# Altium PCB PCB_DTNEA-Z-AXIS-PRESS-MONITOR-TRANSMITTER_2021-11-17.pcbdoc
Units mm, origin at the board's own origin, x right, y up, seen from the top; angles counter-clockwise.
Board outline 118.62 x 68.71 mm, 2 copper layers (Top Layer, Bottom Layer); 30 components, 27 nets, 121 pads, 21 vias.
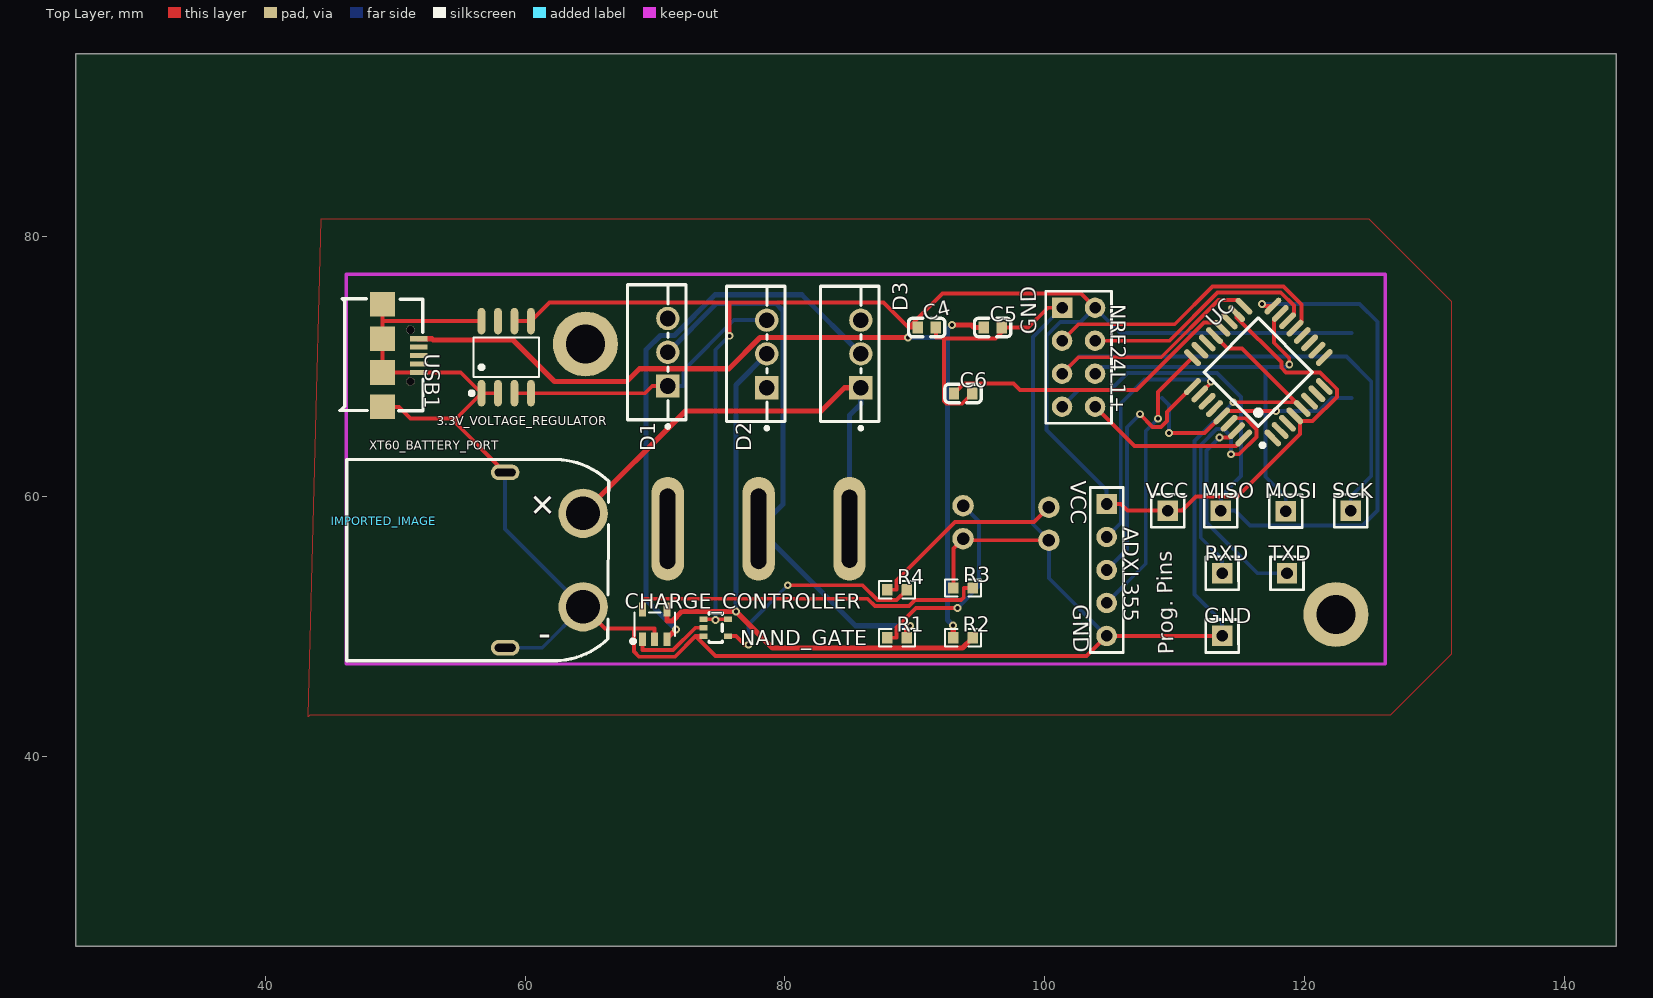
[diagram p0: Top Layer view]
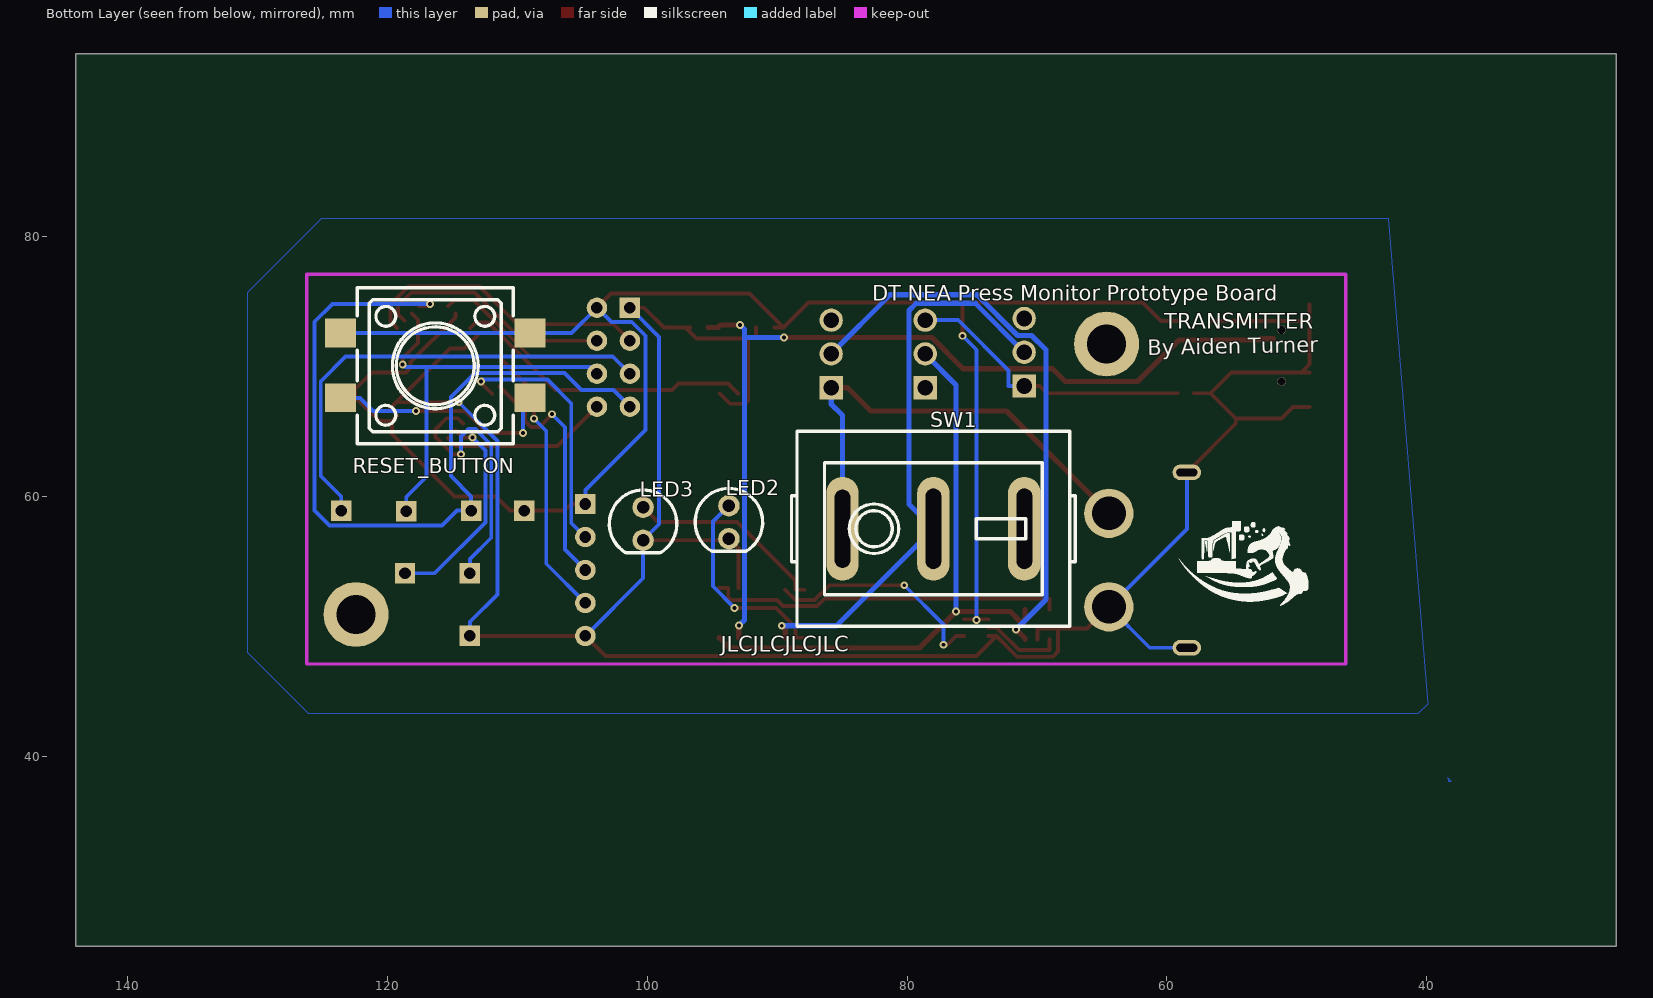
[diagram p1: Bottom Layer view, seen from below]

## Layer stack, top to bottom
Top Layer: signal copper (thickness not stored)
Dielectric: dielectric 0.32, FR-4, Dk 4.8
Bottom Layer: signal copper (thickness not stored)

## Board outline
144.018,25.4 25.4,25.4 25.4,94.107 144.018,94.107

## Components (designator, comment, footprint, x,y, rotation, side; value= is the part's Value field where it differs from the comment)
3.3V_VOLTAGE_REGULATOR "TPS77633DR" SOIC-8_L4.9-W3.9-P1.27-LS6.0-BL 58.547,70.739 r0 top
ADXL355 "HDR-M-2.54_1x5" HDR-M-2.54_1X5 104.775,54.356 r270 top
C4 "1uF" C0603 90.932,73.025 r0 top
C5 "1uF" C0603 96.012,73.025 r0 top
C6 "1uF" C0603 93.726,67.945 r0 top
CHARGE_CONTROLLER "AAP2154OIR1" TSOT-23-5_L2.9-W1.6-P0.95-LS2.8-BL 69.977,50.165 r0 top
D1 "SDURF1030CTR" ITO-220AB-3_L10.2-W4.5-P2.60-L 70.993,71.12 r90 top
D2 "SDURF1030CTR" ITO-220AB-3_L10.2-W4.5-P2.60-L 78.613,70.993 r90 top
D3 "SDURF1030CTR" ITO-220AB-3_L10.2-W4.5-P2.60-L 85.852,70.993 r90 top
GND "HDR-M-2.54_1x1" HDR-M-2.54_1X1 113.665,49.276 r0 top
IMPORTED_IMAGE "IMPORTED_IMAGE" IMPORTED_IMAGE 49.103,58.114 r0 top
LED2 "LED-TH-5mm_R" LED-TH_BD5.0_RED 93.726,58.039 r0 bottom
LED3 "LED-TH-5mm_R" LED-TH_BD5.0_RED 100.33,57.912 r0 bottom
MISO "HDR-M-2.54_1x1" HDR-M-2.54_1X1 113.571,58.928 r0 top
MOSI "HDR-M-2.54_1x1" HDR-M-2.54_1X1 118.571,58.892 r0 top
NAND_GATE "MC74VHC1G01DFT1G" SOT-353_L2.0-W1.2-P0.65-LS2.1-TL 74.676,49.911 r0 top
NRF24L1+ "HDR-M-2.54_2x4" HDR-M-2.54_2X4 102.616,70.739 r270 top
R1 "1Ω" R0603 88.634,49.139 r0 top
R2 "0.25Ω" R0603 93.714,49.139 r0 top
R3 "1.25kΩ" R0603 93.726,52.959 r0 top
R4 "1Ω" R0603 88.646,52.832 r0 top
RESET_BUTTON "TS-1094S-A4B3-D1" KEY-SMD_4P-L12.0-W12.0-P5.00-LS15.2 116.332,70.104 r0 bottom
RXD "HDR-M-2.54_1x1" HDR-M-2.54_1X1 113.665,54.102 r0 top
SCK "HDR-M-2.54_1x1" HDR-M-2.54_1X1 123.571,58.928 r0 top
SW1 "Rocker switch601-10211BB" SW-TH_601-10211BB 77.978,57.531 r0 bottom
TXD "HDR-M-2.54_1x1" HDR-M-2.54_1X1 118.665,54.102 r0 top
UC "ATMEGA328PB-AU" TQFP-32_L7.0-W7.0-P0.80-LS9.0-BL 116.459,69.596 r45 top
USB1 "Micro USB-B 5P_C40942" MICRO-USB-SMD_5P-P0.65-H-M_MICRO-USB-5P 50.419,70.866 r270 top
VCC "HDR-M-2.54_1x1" HDR-M-2.54_1X1 109.474,58.928 r0 top
XT60_BATTERY_PORT "XT60PW-M" CONN-TH_XT60PW-M 61.468,55.118 r0 top

## Footprints (in the part's own frame and the unit in brackets; to place one, negate y for a bottom-side part, rotate by r counter-clockwise, add the part's x,y. Pads: shape width x height; smd on the part's side, far side on the other; paste and mask are expansions set on the pad)
C0603 [mm]
  rect 0.8x0.9 smd: 1(-0.7,0) 2(0.7,0)
  silkscreen extent -1.41,-0.71 1.39,0.72
CONN-TH_XT60PW-M [mm]
  round 3.8 hole 2.6: 1(3,-3.6) 2(3,3.6)
  oval 2.2x1.2 hole 0.6 slot 1.6 at 0 deg: 3(-3,6.75) 4(-3,-6.75)
  silkscreen extent -15.2,-7.75 4.96,7.75
HDR-M-2.54_1X1 [mil]
  rect 62x62 hole 35: 1(0,0)
  silkscreen extent -50,-50 50,50
HDR-M-2.54_1X5 [mil]
  rect 62x62 hole 35: 1(-200,0)
  round 62 hole 35: 2(-100,0) 3(0,0) 4(100,0) 5(200,0)
  silkscreen extent -250,-50 250,50
HDR-M-2.54_2X4 [mil]
  rect 62x62 hole 35: 1(-150,-50)
  round 62 hole 35: 2(-150,50) 3(-50,-50) 4(-50,50) 5(50,-50) 6(50,50) 7(150,-50) 8(150,50)
  silkscreen extent -200,-100 200,100
IMPORTED_IMAGE [mm]
ITO-220AB-3_L10.2-W4.5-P2.60-L [mm]
  rect 1.8x1.8 hole 1.2: 1(-2.6,0)
  round 1.8 hole 1.2: 2(0,0) 3(2.6,0)
  silkscreen extent -5.84,-1.4 5.2,3.1
KEY-SMD_4P-L12.0-W12.0-P5.00-LS15.2 [mm]
  rect 2.4x2.2 smd: 1(7.3,-2.5) 2(-7.3,-2.5) 3(7.3,2.5) 4(-7.3,2.5)
  silkscreen extent -6,-5.98 6,6.02
LED-TH_BD5.0_RED [mil]
  round 65 hole 38: 1(0,-50) 2(0,50)
  silkscreen extent -102,-102 102,88
MICRO-USB-SMD_5P-P0.65-H-M_MICRO-USB-5P [mm]
  rect 1.9x1.9 smd: 0(-3.95,-1.392) 0(-1.3,-1.392) 0(1.3,-1.392) 0(3.95,-1.392)
  rect 0.4x1.35 smd: 1(-1.3,1.392) 2(-0.65,1.392) 3(0,1.392) 4(0.65,1.392) 5(1.3,1.392)
  round 0.65 hole 0.65 unplated: ""(-1.999,0.756) ""(1.999,0.756)
  silkscreen extent -4.37,-4.68 4.24,1.72
R0603 [mm]
  rect 0.806x0.864 smd: 1(-0.753,0) 2(0.753,0)
  silkscreen extent -1.39,-0.66 1.39,0.66
SOIC-8_L4.9-W3.9-P1.27-LS6.0-BL [mm]
  oval 0.588x2.045 smd: 1(-1.905,-2.773) 2(-0.635,-2.773) 3(0.635,-2.773) 4(1.905,-2.773) 5(1.905,2.773) 6(0.635,2.773) 7(-0.635,2.773) 8(-1.905,2.773)
  silkscreen extent -2.8,-2.92 2.53,1.52
SOT-353_L2.0-W1.2-P0.65-LS2.1-TL [mm]
  rect 0.6x0.4 smd: 1(-0.95,0.65) 2(-0.95,0) 3(-0.95,-0.65) 4(0.95,-0.65) 5(0.95,0.65)
  silkscreen extent -0.51,-1.14 0.51,1.14
SW-TH_601-10211BB [mm]
  oval 2.5x8 hole 1.2 slot 6 at 90 deg: 1(7,0)
  oval 2.5x8 hole 1.2 slot 6.2 at 90 deg: 2(0,0) 3(-7,0)
  silkscreen extent -10.92,-7.5 10.92,7.5
TQFP-32_L7.0-W7.0-P0.80-LS9.0-BL [mm]
  oval 0.45x1.65 smd: 1(-2.8,-4.369) 2(-2,-4.369) 3(-1.2,-4.369) 4(-0.4,-4.369) 5(0.4,-4.369) 6(1.2,-4.369) 7(2,-4.369) 8(2.8,-4.369) 17(2.8,4.369) 18(2,4.369) 19(1.2,4.369) 20(0.4,4.369) 21(-0.4,4.369) 22(-1.2,4.369) 23(-2,4.369) 24(-2.8,4.369)
  oval 1.65x0.45 smd: 9(4.382,-2.8) 10(4.382,-2) 11(4.381,-1.2) 12(4.381,-0.4) 13(4.381,0.4) 14(4.381,1.2) 15(4.382,2) 16(4.382,2.8) 25(-4.382,2.8) 26(-4.382,2) 27(-4.381,1.2) 28(-4.381,0.4) 29(-4.381,-0.4) 30(-4.381,-1.2) 31(-4.382,-2) 32(-4.382,-2.8)
  silkscreen extent -3.91,-4.36 2.94,2.95
TSOT-23-5_L2.9-W1.6-P0.95-LS2.8-BL [mm]
  rect 0.532x1.045 smd: 1(-0.95,-1.147) 2(0,-1.147) 3(0.95,-1.147) 4(0.95,1.147) 5(-0.95,1.147)
  silkscreen extent -1.82,-1.45 1.55,0.9

## Free pads (board coordinates)
  round 5 hole 3: 1(64.643,71.755) 1(122.428,50.927)

## Via types
v1: diameter 0.61, hole 0.305, Top Layer to Bottom Layer, 21 vias

## Nets (pads, with @x,y where several pads share a name; then routed paths per layer and width w, separated by ;. In a path a pad name is that pad's centre, name@x,y a point inside that pad or via, vN(x,y) a via of type N, cw(c..) or ccw(c..) an arc to the next point about the centre after c; other vN are vias at no path point)
3.3V_VOLTAGE_REGULATOR_3: 3.3V_VOLTAGE_REGULATOR.3 3.3V_VOLTAGE_REGULATOR.4 D1.1 D2.3 | length 22.5
  Top Layer w0.3: 3.3V_VOLTAGE_REGULATOR.3@59.182,67.967 60.452,67.967 69.235,67.967 69.789,68.52 D1.1
  Bottom Layer w0.3: D1.1 72.197,68.52 72.197,69.724 76.066,73.593 D2.3
CHARGE_CONTROLLER_1: CHARGE_CONTROLLER.1 NAND_GATE.2 | length 6.2
  Top Layer w0.3: CHARGE_CONTROLLER.1 69.027,48.191 71.401,48.191 73.122,49.911 NAND_GATE.2
CHARGE_CONTROLLER_3: CHARGE_CONTROLLER.3 D3.2 | length 43.7
  Top Layer w0.4: CHARGE_CONTROLLER.3 70.927,49.095 v1(71.613,49.781)
  Bottom Layer w0.4: v1(71.613,49.781) 69.32,52.074 69.32,71.311 70.43,72.42 71.51,72.42 74.634,75.544 81.301,75.544 D3.2
CHARGE_CONTROLLER_4: CHARGE_CONTROLLER.4 D2.2 R2.2 | length 47
  Top Layer w0.4: CHARGE_CONTROLLER.4 70.927,50.438 71.338,50.438 72.068,51.168 v1(76.23,51.168) 79.045,48.353 93.682,48.353 R2.2
  Bottom Layer w0.4: v1(76.23,51.168) 76.23,68.61 D2.2
CHARGE_CONTROLLER_5: CHARGE_CONTROLLER.5 R3.2 | length 27.5
  Top Layer w0.3: CHARGE_CONTROLLER.5 69.027,52.139 86.376,52.139 86.936,51.579 89.571,51.579 90.026,52.034 93.554,52.034 93.772,52.251 93.772,52.959 R3.2
GND: 3.3V_VOLTAGE_REGULATOR.1 3.3V_VOLTAGE_REGULATOR.2 3.3V_VOLTAGE_REGULATOR.8 ADXL355.5 C4.2 C5.2 C6.2 CHARGE_CONTROLLER.2 GND.1 LED2.2 LED3.2 NAND_GATE.3 NRF24L1+.1 R3.1 UC.5 UC.21 USB1.0 USB1.5 XT60_BATTERY_PORT.1 XT60_BATTERY_PORT.3 XT60_BATTERY_PORT.4 | length 207.2
  Top Layer w0.3: USB1.0@49.027,66.916 50.281,66.916 51.175,66.022 54.697,66.022 ; USB1.0@49.027,69.566 USB1.0@49.654,69.566 ; USB1.0@49.027,74.816 49.027,73.511 ; 3.3V_VOLTAGE_REGULATOR.8 49.027,73.511 ; 3.3V_VOLTAGE_REGULATOR.2@57.912,67.967 3.3V_VOLTAGE_REGULATOR.1@56.642,67.967 ; XT60_BATTERY_PORT.3@58.468,61.868 54.697,65.639 54.697,66.022 ; XT60_BATTERY_PORT.1 66.142,49.844 68.372,49.844 ; CHARGE_CONTROLLER.2 69.977,49.844 68.372,49.844 ; NAND_GATE.3 73.122,49.261 ; C4.2 91.632,72.271 92.167,72.271 92.251,72.187 ; R3.1 92.973,56.016 LED2.2 93.853,56.642 LED3.2 ; C6.2 93.637,67.156 92.457,67.156 92.251,67.362 92.251,72.187 ; C5.2 C5.2@97.064,73.025 ; NRF24L1+.1 100.254,74.549 98.73,73.025 C5.2@97.064,73.025 ; UC.21 114.069,71.42 115.2,71.42 UC.5@119.715,66.906 ; GND.1 ADXL355.5 103.234,47.736 74.647,47.736 73.122,49.261 ; v1(114.526,67.272) 119.349,67.272 UC.5@119.715,66.906 ; UC.5 UC.5@119.715,66.906 ; 49.027,73.511 49.027,72.166 49.027,70.193 USB1.0@49.654,69.566 ; USB1.0@49.654,69.566 50.281,69.566 50.832,69.566 USB1.5 55.043,69.566 3.3V_VOLTAGE_REGULATOR.1@56.642,67.967 ; 54.697,66.022 3.3V_VOLTAGE_REGULATOR.1@56.642,67.967 ; 68.372,49.844 68.372,48.069 68.767,47.674 71.535,47.674 73.122,49.261 ; 92.251,72.187 96.226,72.187 C5.2@97.064,73.025
  Bottom Layer w0.3: XT60_BATTERY_PORT.4 61.318,48.368 XT60_BATTERY_PORT.1 58.468,57.518 XT60_BATTERY_PORT.3@58.468,61.868 ; NRF24L1+.1 99.096,72.299 99.096,57.876 LED3.2 100.33,53.721 ADXL355.5 ; GND.1 113.665,50.368 111.553,52.479 111.553,64.299 v1(114.526,67.272)
NAND_GATE_4: NAND_GATE.4 R4.2 | length 17.7
  Top Layer w0.3: NAND_GATE.4 76.23,49.261 76.892,48.599 v1(77.189,48.599) ; v1(80.224,53.181) 85.978,53.181 87.125,52.034 88.601,52.034 R4.2
  Bottom Layer w0.3: v1(77.189,48.599) 77.189,50.146 v1(80.224,53.181)
R1_1: LED2.1 R1.1 | length 15.9
  Top Layer w0.3: R1.1 88.588,49.139 88.588,49.916 90.096,51.424 v1(93.282,51.424)
  Bottom Layer w0.3: v1(93.282,51.424) 94.96,53.102 94.96,58.075 LED2.1
R4_1: LED3.1 R4.1 | length 15.5
  Top Layer w0.3: R4.1 88.6,52.832 88.6,53.54 93.1,58.039 99.187,58.039 LED3.1
S$1242: 
SW1_2: D1.2 R1.2 SW1.2 | length 44.1
  Top Layer w0.4: R1.2 89.387,49.923 89.515,49.923 v1(89.655,50.063)
  Bottom Layer w0.4: D1.2 74.763,74.89 79.3,74.89 79.867,74.323 79.867,59.42 SW1.2 85.446,50.063 v1(89.655,50.063)
UC_4: 3.3V_VOLTAGE_REGULATOR.5 3.3V_VOLTAGE_REGULATOR.6 ADXL355.1 C4.1 NAND_GATE.1 NAND_GATE.5 NRF24L1+.2 RESET_BUTTON.1 RESET_BUTTON.2 UC.4 UC.18 VCC.1 | length 149.1
  Top Layer w0.3: 3.3V_VOLTAGE_REGULATOR.6 3.3V_VOLTAGE_REGULATOR.5 61.892,74.952 75.749,74.952 ; NAND_GATE.1 v1@74.676,50.561 ; v1@74.676,50.496 v1@74.676,50.561 ; NAND_GATE.5 v1@74.676,50.561 ; v1(75.749,72.389) 75.749,74.952 ; C4.1 89.528,73.025 ; NRF24L1+.2 102.794,75.641 92.144,75.641 89.528,73.025 ; ADXL355.1 105.867,59.436 106.375,58.928 VCC.1 110.02,58.928 110.566,58.928 111.657,60.02 114.857,60.02 119.665,64.827 UC.4@119.665,65.825 ; UC.18 114.784,73.806 118.231,70.36 118.231,69.929 118.588,69.572 121.209,69.572 122.507,68.274 122.507,67.69 120.641,65.825 UC.4@119.665,65.825 ; UC.4 UC.4@119.665,65.825 ; 75.749,74.952 87.601,74.952 89.528,73.025
  Bottom Layer w0.3: v1@74.676,50.496 74.676,71.316 v1(75.749,72.389) ; ADXL355.1 104.775,60.528 100.16,65.143 100.16,72.393 101.207,73.44 102.777,73.44 NRF24L1+.2 105.831,72.604 RESET_BUTTON.2 110.536,72.604 122.128,72.604 RESET_BUTTON.1
  other v1: 74.676,50.496
UC_13: NRF24L1+.3 UC.13 | length 22.8
  Top Layer w0.3: NRF24L1+.3 102.616,73.279 110.02,73.279 112.925,76.185 118.385,76.185 119.776,74.793 119.776,73.478 UC.13
UC_14: NRF24L1+.4 UC.14 | length 18.6
  Top Layer w0.3: NRF24L1+.4 109.604,72.009 113.325,75.73 118.182,75.73 119.188,74.724 119.188,74.022 UC.14
UC_15: MOSI.1 NRF24L1+.6 UC.15 | length 31.6
  Top Layer w0.3: UC.15 117.655,73.62 117.655,71.854 118.84,70.668 v1(118.84,70.181)
  Bottom Layer w0.3: NRF24L1+.6 104.389,69.972 117.021,69.972 ; MOSI.1@118.571,58.892 118.571,59.984 117.021,61.535 117.021,69.972 ; v1(118.84,70.181) 118.63,69.972 117.021,69.972
UC_16: MISO.1 NRF24L1+.7 UC.16 | length 62.9
  Top Layer w0.3: v1(116.738,74.842) 116.905,74.674 UC.16
  Bottom Layer w0.3: NRF24L1+.7 102.616,68.199 105.087,68.199 106.398,69.511 113.289,69.511 115.135,67.664 115.135,61.584 113.571,60.02 MISO.1 114.663,58.928 115.805,57.785 124.486,57.785 125.636,58.935 125.636,73.467 124.261,74.842 v1(116.738,74.842)
UC_17: NRF24L1+.5 SCK.1 UC.17 | length 52.3
  Top Layer w0.3: NRF24L1+.5 102.616,70.739 108.978,70.739 113.388,75.149 114.866,75.149 UC.17
  Bottom Layer w0.3: NRF24L1+.5 102.668,70.791 123.234,70.791 125.148,68.877 125.148,61.597 123.571,60.02 SCK.1
UC_20: C6.1 UC.20 | length 23.5
  Top Layer w0.3: C6.1 93.781,68.7 97.606,68.7 98.107,68.199 107.082,68.199 112.285,73.402 113.218,73.402 UC.20
UC_24: ADXL355.4 UC.24 | length 21.6
  Top Layer w0.3: v1(108.738,66.002) 108.738,68.054 UC.24
  Bottom Layer w0.3: ADXL355.4 107.792,54.833 107.792,65.056 v1(108.738,66.002)
UC_25: ADXL355.3 UC.25 | length 19.2
  Top Layer w0.3: v1(107.345,66.35) 108.321,65.373 108.974,65.373 109.432,65.832 109.432,66.529 UC.25
  Bottom Layer w0.3: ADXL355.3 106.342,55.923 106.342,65.347 v1(107.345,66.35)
UC_26: ADXL355.2 UC.26 | length 19.8
  Top Layer w0.3: UC.26@111.947,67.912 112.805,68.771 v1@112.805,68.881
  Bottom Layer w0.3: ADXL355.2 105.867,57.988 105.867,67.169 107.706,69.008 112.678,69.008 v1@112.805,68.881
  other v1: 112.805,68.881
UC_29: RESET_BUTTON.3 RESET_BUTTON.4 UC.29 | length 18.1
  Top Layer w0.3: v1(109.583,64.892) 112.321,64.892 UC.29 114.032,66.603 v1(117.803,66.603)
  Bottom Layer w0.3: RESET_BUTTON.4 109.583,67.053 v1(109.583,64.892) ; v1(117.803,66.603) 121.127,66.603 122.128,67.604 RESET_BUTTON.3
UC_30: RXD.1 UC.30 | length 20.7
  Top Layer w0.3: UC.30 114.602,66.042 115.456,66.042 116.311,65.187 116.311,64.608 114.971,63.267 v1(114.363,63.267)
  Bottom Layer w0.3: RXD.1 113.665,55.194 112.024,56.835 112.024,63.994 113.244,65.214 113.787,65.214 114.363,64.637 v1(114.363,63.267)
UC_31: TXD.1 UC.31 | length 16.3
  Top Layer w0.3: v1(113.47,64.561) 114.252,64.561 UC.31@114.775,65.084
  Bottom Layer w0.3: v1(113.47,64.561) 112.479,63.57 112.479,58.015 116.392,54.102 TXD.1@118.665,54.102
UC_32: NRF24L1+.8 UC.32 | length 13
  Top Layer w0.3: NRF24L1+.8 106.913,63.902 114.725,63.902 UC.32
USB1_1: C5.1 R2.1 USB1.1 | length 70.4
  Top Layer w0.4: USB1.1 52.839,72.167 52.935,72.07 59.062,72.07 62.268,68.863 67.826,68.863 68.818,69.856 75.703,69.856 78.094,72.247 v1(89.478,72.246) ; v1(92.859,73.213) 94.372,73.213 94.56,73.025 C5.1 ; R2.1 v1(92.961,50.073)
  Bottom Layer w0.4: v1(89.478,72.246) 92.533,72.247 ; v1(92.859,73.213) 92.533,72.888 92.533,72.247 ; v1(92.961,50.073) 92.533,50.5 92.533,72.247
XT60_BATTERY_PORT_2: D3.1 SW1.1 XT60_BATTERY_PORT.2 | length 36.6
  Top Layer w0.4: XT60_BATTERY_PORT.2 72.34,66.59 82.797,66.59 84.6,68.393 D3.1
  Bottom Layer w0.4: SW1.1 84.978,66.267 85.852,67.141 D3.1
pads on no net: 3.3V_VOLTAGE_REGULATOR.7 D1.3 D2.1 D3.3 SW1.3 UC.1 UC.2 UC.3 UC.6 UC.7 UC.8 UC.9 UC.10 UC.11 UC.12 UC.19 UC.22 UC.23 UC.27 UC.28 USB1. USB1.2 USB1.3 USB1.4

## Polygon pours and split planes (outlines as drawn)
GND on Bottom Layer (solid): 38.367,38.367 38.354,38.1 38.1,38.1 38.367,38.367
GND on Bottom Layer (solid): 42.926,81.407 125.095,81.407 130.81,75.692 130.81,48.006 126.111,43.307 40.64,43.307 39.878,44.069
GND on Top Layer (solid): 44.323,81.407 124.968,81.407 131.318,75.057 131.318,47.879 126.619,43.18 43.434,43.18 43.307,43.053

## Silkscreen, mask and mechanical layers (free items; w line width, h text height)
Top Overlay:
  text "GND" at 99.822,72.517 h2.03 r91
  text "VCC" at 101.6,61.214 h2.03 r270
  text "GND" at 101.727,51.689 h2.03 r271
  text "Prog. Pins" at 110.363,47.879 h2.03 r91
Bottom Overlay:
  text "DT NEA Press Monitor Prototype Board" at 82.677,74.676 h2.03
  text "TRANSMITTER" at 60.198,72.517 h2.03
  text "By Aiden Turner" at 61.468,70.485 h2.03 r359
  text "JLCJLCJLCJLC" at 94.361,47.625 h2.03

## Text inside footprints (layer, text, board x,y; h text height)
XT60_BATTERY_PORT: Top Overlay "-" at 62.024,50.038 h2.03 r180; Top Overlay "+" at 61.56,60.789 h2.03 r225